# EAGLE board test (EAGLE 9.7.0)
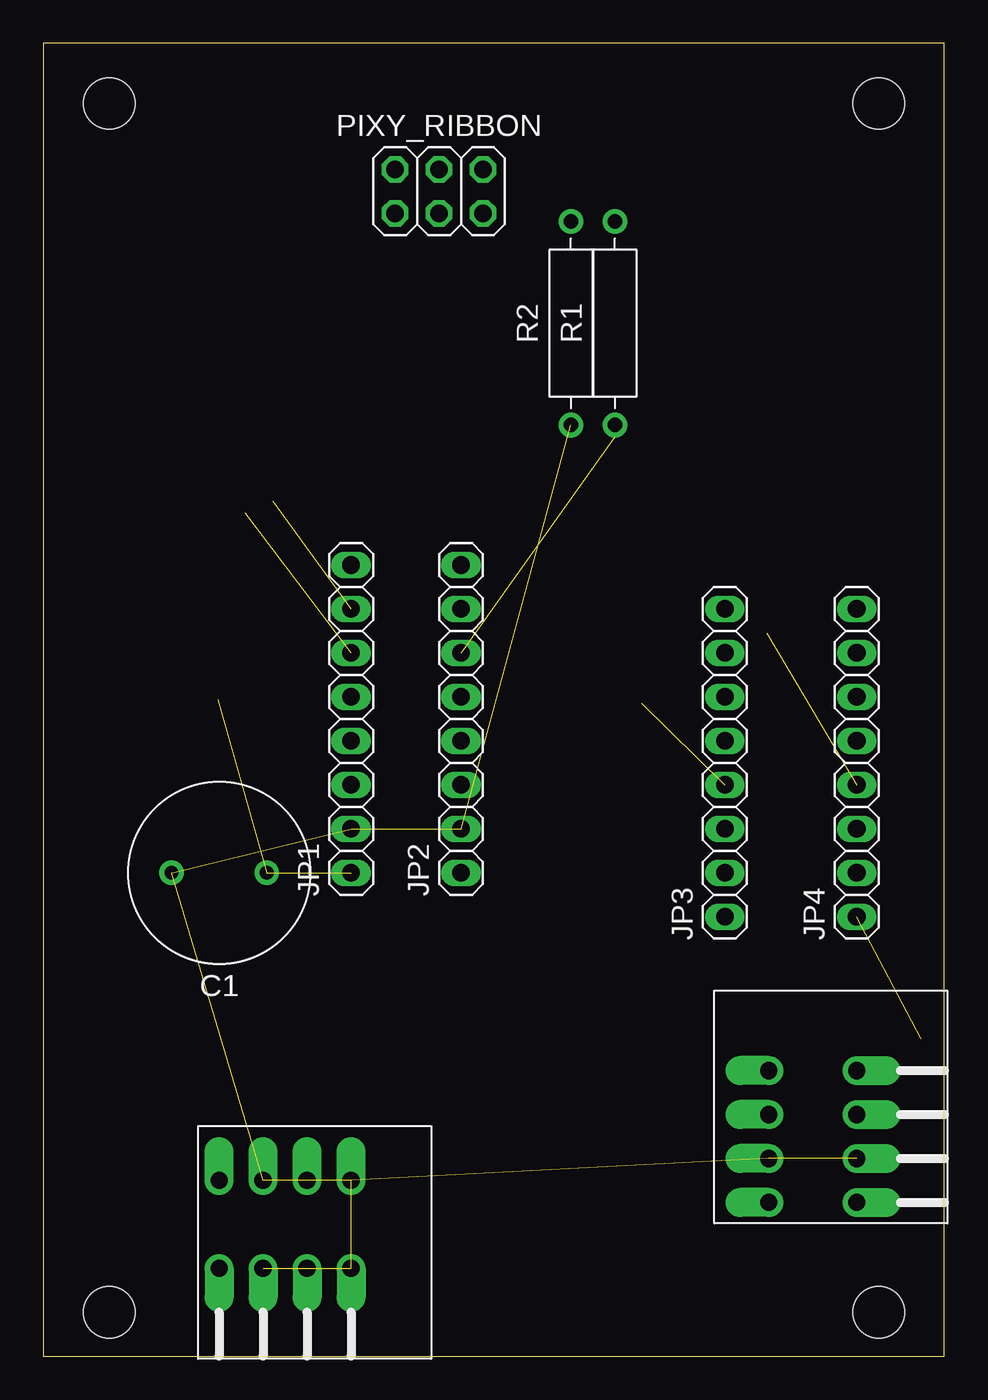
[diagram p0: board, top side]
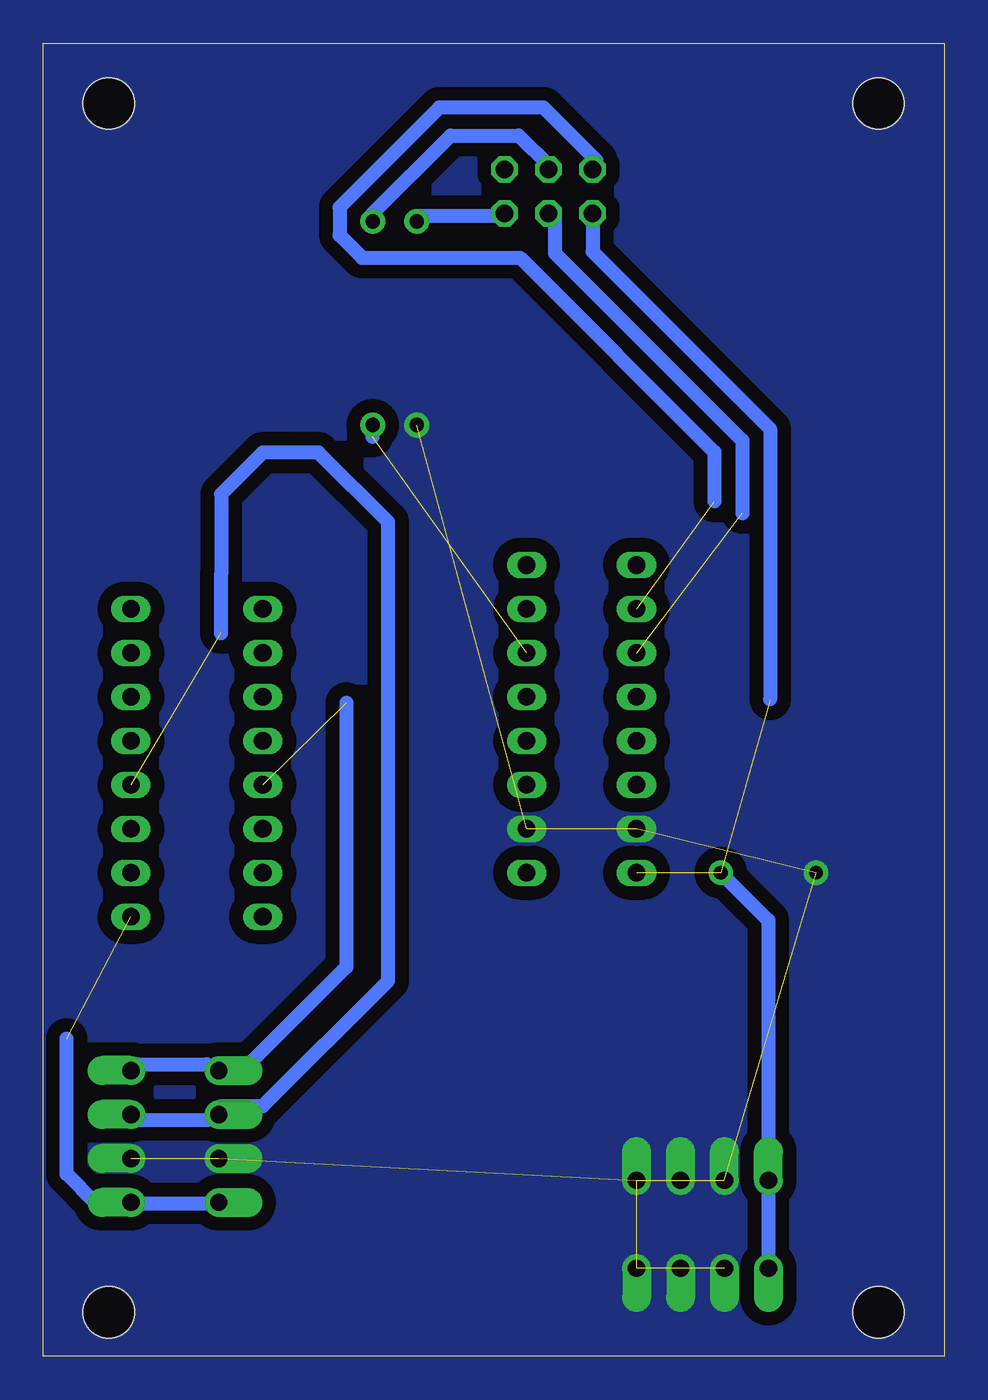
[diagram p1: board, bottom side, seen from below]

Size 52.05 x 75.87 mm. Coordinates in mm from the lower left corner, seen from the top.
Outline: 0,0 52.05,0 52.05,75.87 0,75.87 0,0
Copper layers (1*16): Top 0.035mm / dielectric 1.5mm / Bottom 0.035mm
Design rules "OthermillDRC_1_32_v2 *": minimum track width 32mil, minimum drill 0.8mm, track to track 0.794003125mm, track to pad 0.794003125mm, pad to pad 1mil, via to via 1mil, smd to smd 0mil, copper to edge 0mil, drill to drill 1mil, minimum pad ring 10mil, minimum via ring 10mil, stop-mask expansion 1mil, vias tented up to drill 30mil, thermal gap 10mil
Holes 2.95 mm at 3.81,2.54 48.26,2.54 48.26,72.39 3.81,72.39

## Footprints (pad centres in the part's own frame; a part is rotated, then mirrored left to right if it is on the bottom)
CAPRD550W60D1025H1250B = drill 0.8 pad 1.4: 1 -2.75,0; 2 2.75,0
1X08 = drill 1.016 long: 1 -8.89,0; 2 -6.35,0; 3 -3.81,0; 4 -1.27,0; 5 1.27,0; 6 3.81,0; 7 6.35,0; 8 8.89,0
2X03 = drill 1.016 octagon: 1 -2.54,-1.27; 2 -2.54,1.27; 3 0,-1.27; 4 0,1.27; 5 2.54,-1.27; 6 2.54,1.27
1-2834016-4 = drill 1 pad 1.676 offset: P$1 0,0; P$2 -5.08,0; P$3 0,-2.54; P$4 -5.08,-2.54; P$5 0,-5.08; P$6 -5.08,-5.08; P$7 0,-7.62; P$8 -5.08,-7.62
RESAD1176W63L850D250B = drill 0.83 pad 1.43: 1 -5.88,0; 2 5.88,0

## Placement (x,y rotation side)
C1  10u  [CAPRD550W60D1025H1250B]  10.16,27.94 180 top
JP1  PINHD-1X8  [1X08]  17.78,36.83 90 top
JP2  PINHD-1X8  [1X08]  24.13,36.83 90 top
JP3  PINHD-1X8  [1X08]  39.37,34.29 90 top
JP4  PINHD-1X8  [1X08]  46.99,34.29 90 top
PIXY_RIBBON  PINHD-2X3  [2X03]  22.86,67.31 0 top
POWER_IN  TE_CONN_1-2834016-4  [1-2834016-4]  10.16,10.16 90 top
R1  0  [RESAD1176W63L850D250B]  33.02,59.69 90 top
R2  0  [RESAD1176W63L850D250B]  30.48,59.69 90 top
VL53L0X1  TE_CONN_1-2834016-4  [1-2834016-4]  41.91,8.89 180 top

## Library data of the parts
C1 = Capacitor; CATEGORY: Capacitor
JP1-JP4 = Connector; CATEGORY: Headers; DESCRIPTION: Header, Straight, 8 Position; MANUFACTURER: Generic; MPN: Generic; OPERATING_TEMPERATURE: Generic; PART_STATUS: Active; PITCH: 0.100" (2.54mm); ROHS_COMPLIANCE: Generic; SERIES: Generic; SUB-CATEGORY: Headers, Male Pins; TYPE: Board to Board or Cable, Unshrouded, Through Hole, Straight
PIXY_RIBBON = Connector; CATEGORY: Headers; DESCRIPTION: Header, Straight, 2x3 Position; MANUFACTURER: Generic; MPN: Generic; OPERATING_TEMPERATURE: Generic; PART_STATUS: Active; PITCH: 0.100" (2.54mm); ROHS_COMPLIANCE: Generic; SERIES: Generic; SUB-CATEGORY: Headers, Male Pins; TYPE: Board to Board or Cable, Unshrouded, Through Hole, Straight
POWER_IN = 1-2834016-4; N: POWER_IN
R1 R2 = Resistor; CATEGORY: Resistor; SUB-CATEGORY: Fixed
VL53L0X1 = 1-2834016-4; N: VL53L0X

## Nets
3V3: JP4.1 VL53L0X1.P$1 VL53L0X1.P$2
35: JP1.6 PIXY_RIBBON.3
36: JP2.6 R1.1
36_PIXY: PIXY_RIBBON.4 R1.2
37: JP1.7 PIXY_RIBBON.2
GND: C1.2 JP1.2 JP2.2 POWER_IN.P$3 POWER_IN.P$4 POWER_IN.P$5 POWER_IN.P$6 POWER_IN.P$7 POWER_IN.P$8 R2.1 VL53L0X1.P$3 VL53L0X1.P$4
GND_PIXY: PIXY_RIBBON.5 R2.2
SCL: JP4.4 VL53L0X1.P$5 VL53L0X1.P$6
SDA: JP3.4 VL53L0X1.P$7 VL53L0X1.P$8
VDD: C1.1 JP1.1 PIXY_RIBBON.1 POWER_IN.P$1 POWER_IN.P$2

## Tracks (layer width: path | path; a pad name or v marks a point on that pad's centre or on a via)
3V3  (1 unrouted)
  Bottom 0.813: VL53L0X1.P$1 42.58,8.84 46.6,8.84 VL53L0X1.P$2 47.4,8.84 49.01,8.84 50.7,10.54 50.7,18.35
35  (1 unrouted)
  Bottom 0.813: PIXY_RIBBON.3 22.5,65.67 22.5,63.74 11.67,52.91 11.67,48.72
36  (1 unrouted)
  Bottom 0.813: 33.04,53.13 R1.1
36_PIXY
  Bottom 0.813: PIXY_RIBBON.4 22.86,68.81 24.59,70.54 28.52,70.54 33.02,66.04 33.02,65.74 R1.2
37  (1 unrouted)
  Bottom 0.813: PIXY_RIBBON.2 20.09,69.09 23.14,72.15 29.18,72.15 34.94,66.4 34.94,64.78 33.63,63.47 24.5,63.47 13.28,52.25 13.28,49.39
GND  (11 unrouted)
  pour Bottom: -2.13,-3.4 54.2,-3.4 54.2,78.33 -2.13,78.33
  pour Bottom (no thermals): -4.67,-7.21 59.28,-7.21 59.28,80.87 -4.67,80.87
GND_PIXY
  Bottom 0.813: R2.2 30.53,65.88 25.71,65.88 PIXY_RIBBON.5
SCL  (1 unrouted)
  Bottom 0.813: VL53L0X1.P$6 46.6,13.66 42.58,13.66 VL53L0X1.P$5 41.78,14.46 39.37,14.46 32.14,21.69 32.14,48.2 36.15,52.22 39.37,52.22 41.78,49.81 41.78,45.19 41.79,45.19 41.79,41.78
SDA  (1 unrouted)
  Bottom 0.813: 34.55,37.76 34.55,22.5 40.17,16.87 41.78,16.87 VL53L0X1.P$7 42.58,16.87 46.6,16.87 VL53L0X1.P$8
VDD  (2 unrouted)
  Bottom 0.813: POWER_IN.P$2 POWER_IN.P$1 10.16,11.84 10.16,25.19 C1.1 | PIXY_RIBBON.1 20.32,63.83 10.06,53.58 10.06,37.96